# Altium PCB Infrared_Receive.PcbDoc
Units mil, origin at the board's own origin, x right, y up, seen from the top; angles counter-clockwise.
Board outline 2559.06 x 1968.5 mil, 2 copper layers (Top Layer, Bottom Layer); 43 components, 24 nets, 166 pads, 34 vias.
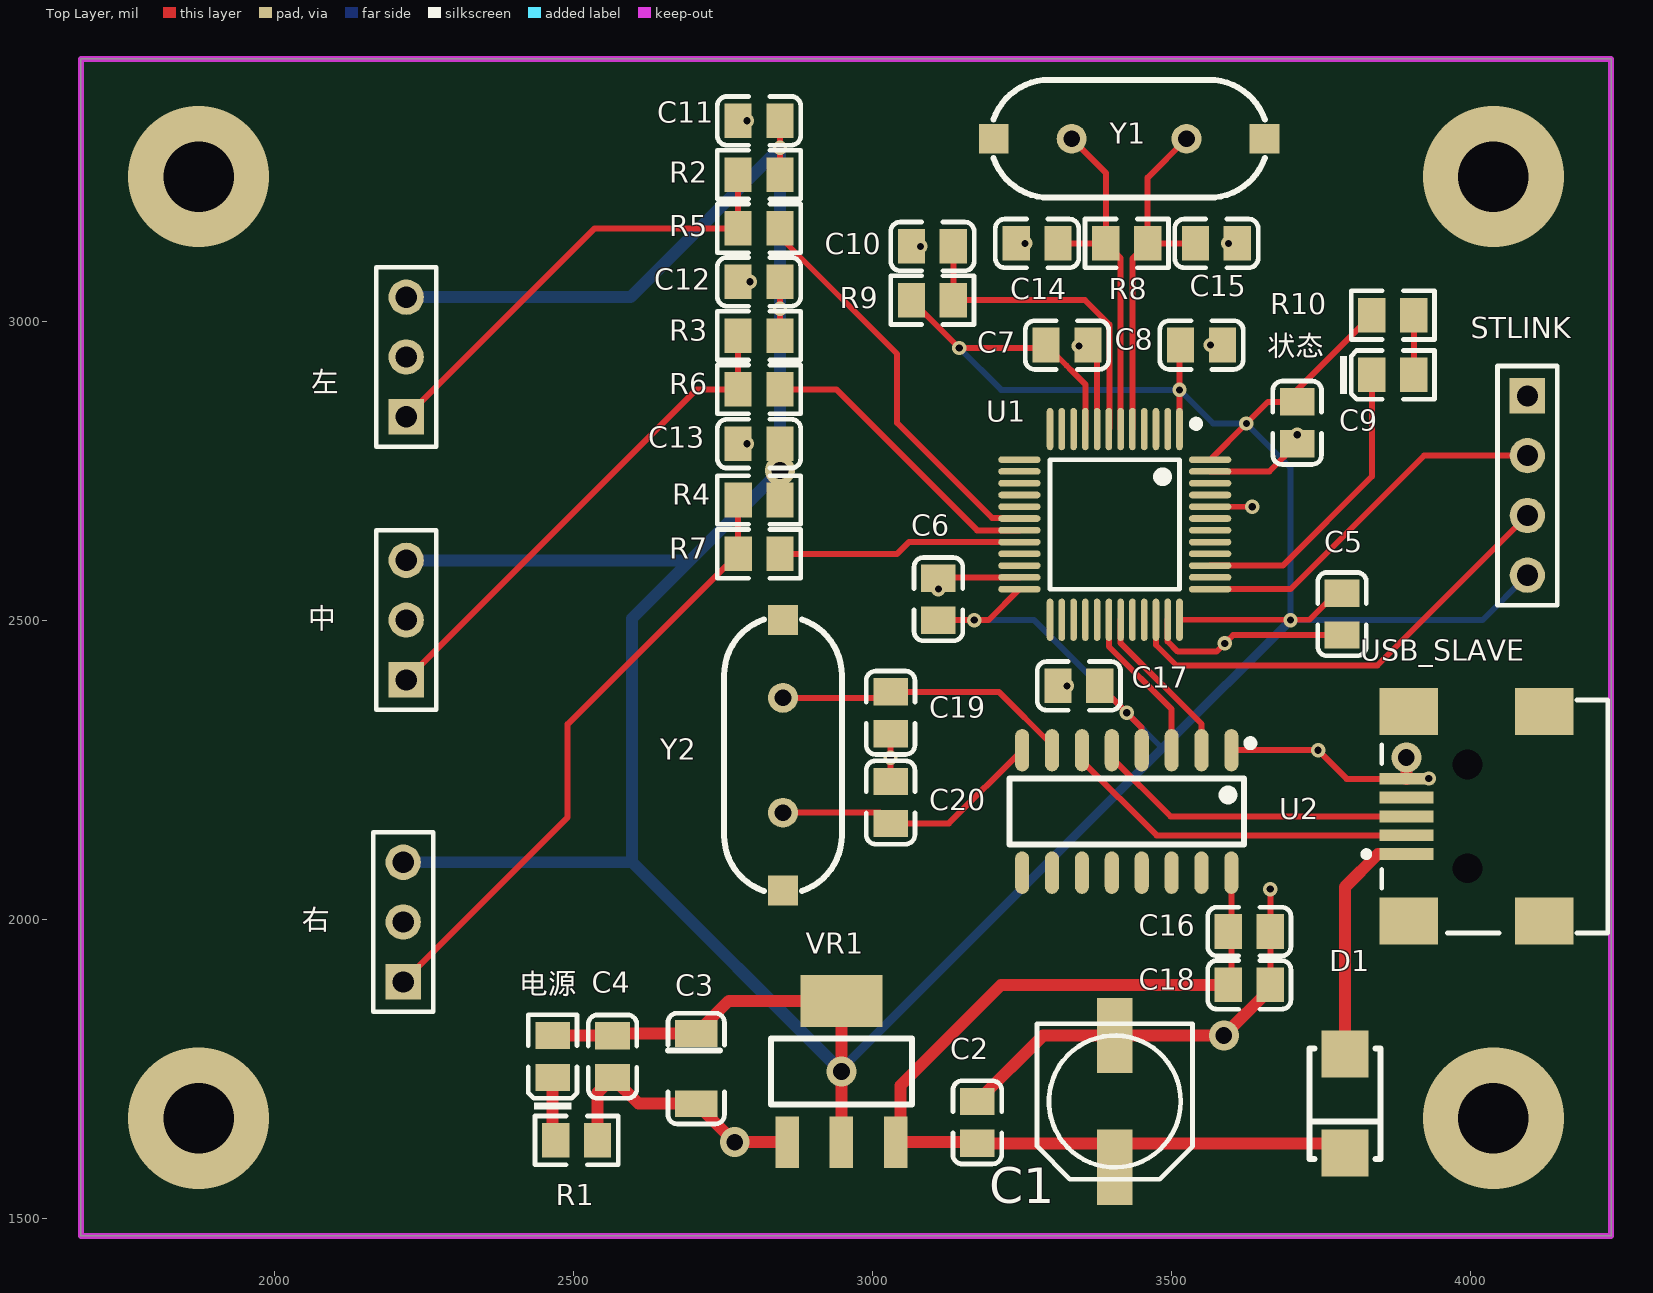
[diagram p0: Top Layer view]
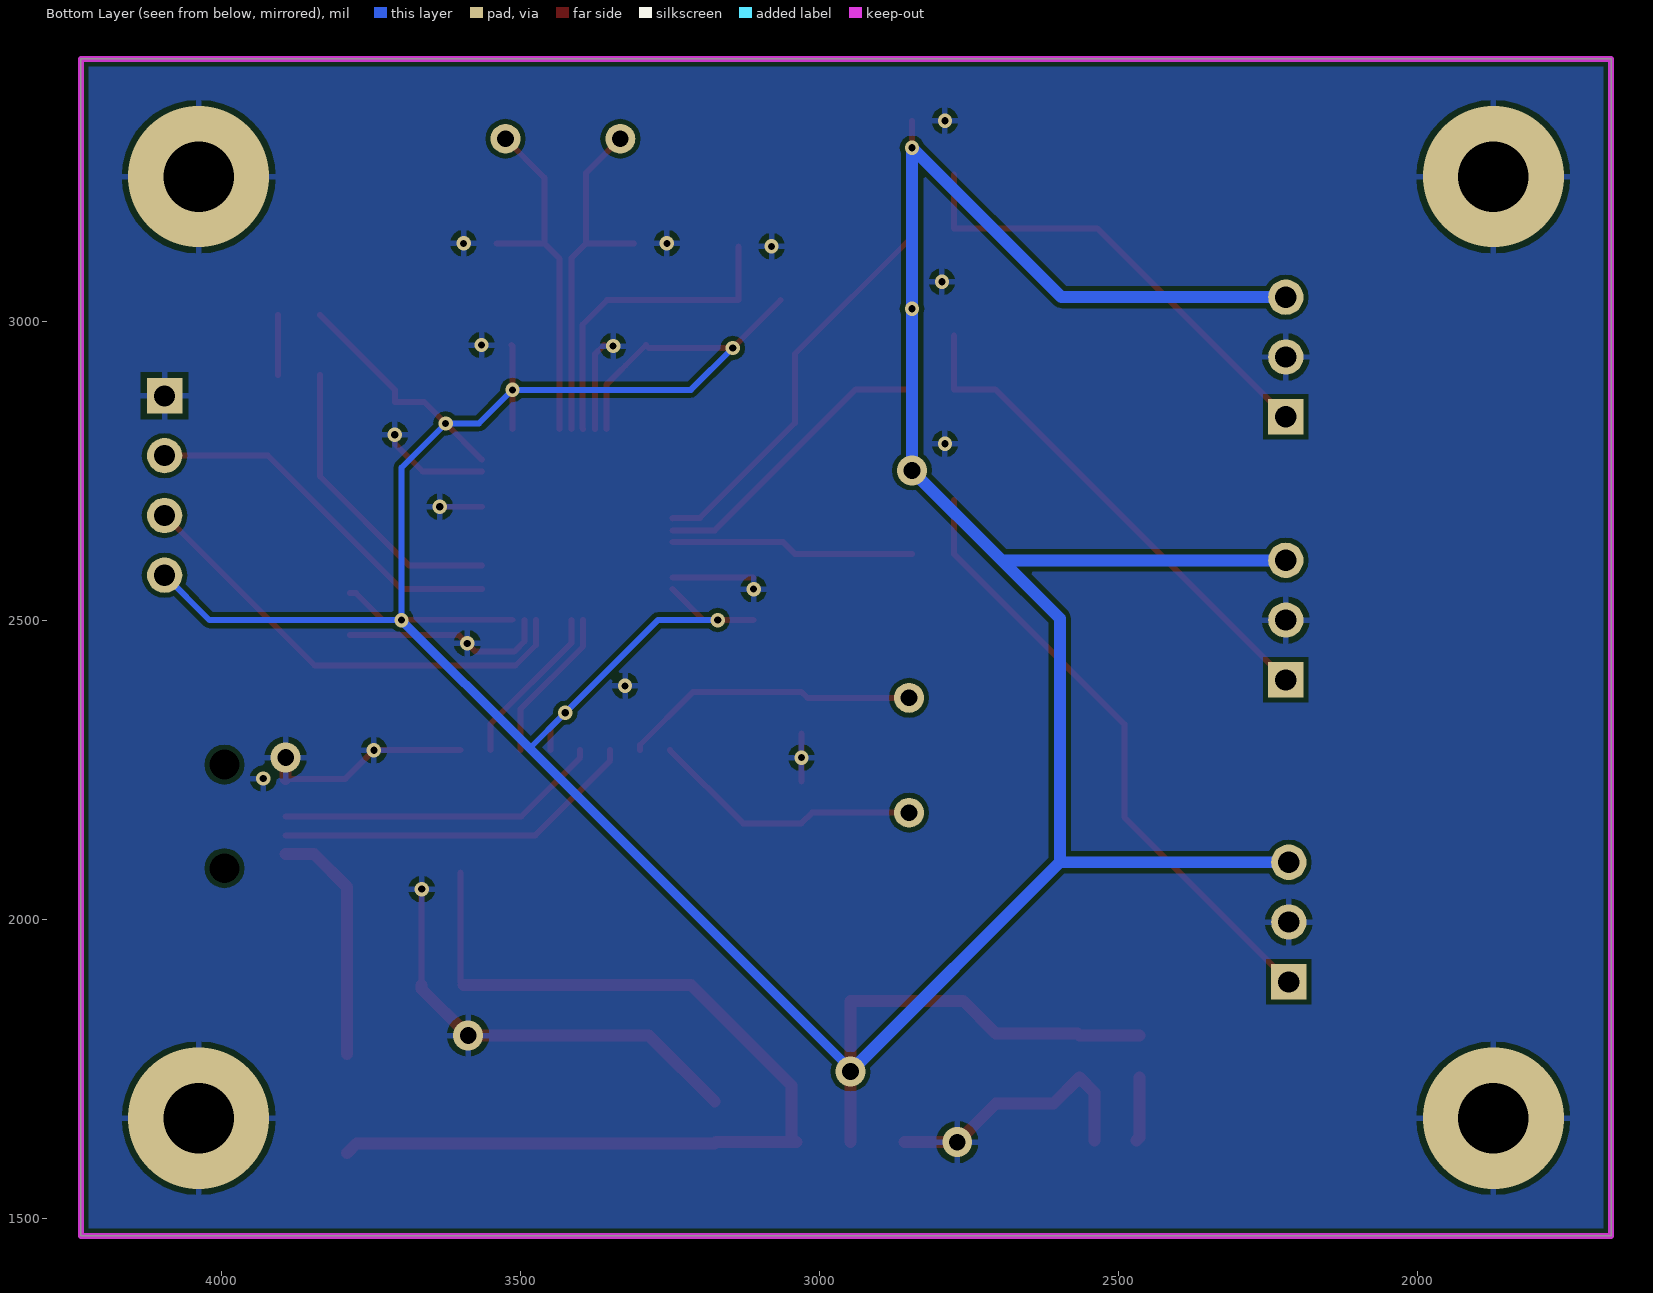
[diagram p1: Bottom Layer view, seen from below]
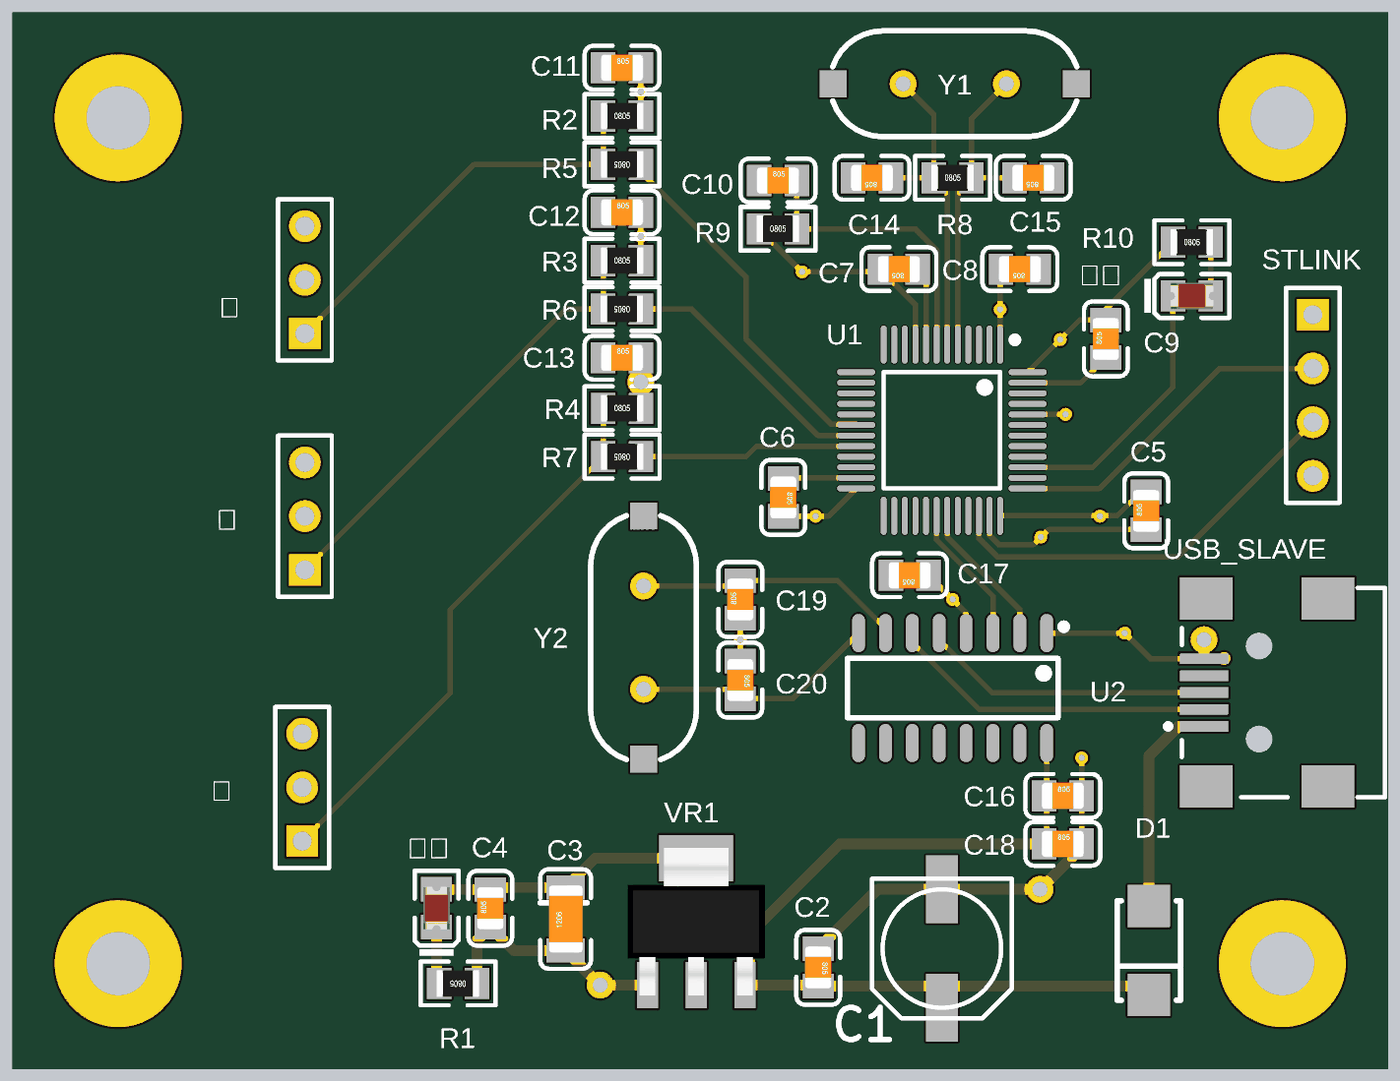
[diagram p2: 3D render of the assembled board from above, using the file's embedded part models]

## Layer stack, top to bottom
Top Solder: solder mask 0.4, Solder Resist, Dk 3.5
Top Layer: signal copper 1.4
Dielectric 1: dielectric 12.6, FR-4, Dk 4.8
Bottom Layer: signal copper 1.4
Bottom Solder: solder mask 0.4, Solder Resist, Dk 3.5

## Board outline
1675.94,1470 1675.94,3438.5 4235,3438.5 4235,1470

## Design rules (kind name [scope] priority, off if disabled: settings)
Clearance [All] p1: gap=8 ignorepadtopadclearanceinfootprint=FALSE
PolygonConnect [All] p1: connectstyle=Relief reliefconductorwidth=10 reliefentries=4 polygonreliefangle="90 Angle" airgapwidth=10
RoutingVias [All] p1: holewidth=28 width=50 viastyle="Through Hole" minholewidth=28 minwidth=50 maxholewidth=28 maxwidth=50
SolderMaskExpansion [All] p1: expansion=4
Width [All] p1: maxlimit=20 minlimit=10 preferedwidth=10
30 further rules are at their usual default settings.

## Components (designator, comment, footprint, x,y, rotation, side; value= is the part's Value field where it differs from the comment)
C1 "220uF" CC6.56.5 3405,1695 r90 top
C2 "100nF(104) 10% 50V" LC-0805_C 3175,1660 r270 top
C3 "4.7uF (475) 10% 50V" LC-1206_C 2705,1750 r90 top
C4 "100nF(104) 10% 50V" LC-0805_C 2565,1770 r90 top
C5 "100nF(104) 10% 50V" LC-0805_C 3785,2510 r90 top
C6 "100nF(104) 10% 50V" LC-0805_C 3110,2535 r270 top
C7 "100nF(104) 10% 50V" LC-0805_C 3325,2960 r180 top
C8 "100nF(104) 10% 50V" LC-0805_C 3550,2960 r180 top
C9 "100nF(104) 10% 50V" LC-0805_C 3710,2830 r90 top
C10 "100nF(104) 10% 50V" LC-0805_C 3100.04,3125 r0 top
C11 "4.7nF (472) 10% 50V" LC-0805_C 2810,3335 r0 top
C12 "4.7nF (472) 10% 50V" LC-0805_C 2810,3065.79 r0 top
C13 "4.7nF (472) 10% 50V" LC-0805_C 2810.04,2795 r0 top
C14 "22pF (220) 5% 50V" LC-0805_C 3275,3130 r180 top
C15 "22pF (220) 5% 50V" LC-0805_C 3575,3130 r180 top
C16 "10uF (106) 10% 25V" LC-0805_C 3630,1979.19 r0 top
C17 "100nF(104) 10% 50V" LC-0805_C 3345,2390 r180 top
C18 "100nF(104) 10% 50V" LC-0805_C 3630,1890 r0 top
C19 "22pF (220) 5% 50V" LC-0805_C 3030,2345 r90 top
C20 "22pF (220) 5% 50V" LC-0805_C 3030,2195 r270 top
D1 "SS210" LC-SMA(DO-214AC)_S1 3790,1691.34 r90 top
R1 "10KΩ (1002) ±1%" LC-0805_R 2505,1630 r180 top
R2 "4.7KΩ (4701) ±1%" LC-0805_R 2810,3245 r0 top
R3 "4.7KΩ (4701) ±1%" LC-0805_R 2810,2975.79 r0 top
R4 "4.7KΩ (4701) ±1%" LC-0805_R 2810.08,2700.88 r0 top
R5 "1KΩ (1001) ±1%" LC-0805_R 2810.04,3155 r180 top
R6 "1KΩ (1001) ±1%" LC-0805_R 2810,2885.79 r180 top
R7 "1KΩ (1001) ±1%" LC-0805_R 2810.08,2610.88 r180 top
R8 "1MΩ (1004) ±1%" LC-0805_R 3425,3130 r0 top
R9 "10KΩ (1002) ±1%" LC-0805_R 3100,3035 r0 top
R10 "10KΩ (1002) ±1%" LC-0805_R 3870,3010 r0 top
STLINK "Header 4" HDR1X4 4095,2875 r270 top
U1 "STM32F103C8T6" LC-LQFP-48_7x7x05P 3404.96,2660 r180 top
U2 "CH340G" LC-SOIC-16_150mil 3425,2180 r180 top
USB_SLAVE "USB-B(Mini)" USB/SM0.8-6H5 4201.69,2171.61 r0 top
VR1 "AMS1117-3.3" LC-SOT-223 2947.87,1745 r270 top
Y1 "8MHz" XTAL_US 3332.87,3305 r0 top
Y2 "12MHz" XTAL_US 2850,2370 r270 top
中 "Header 3" HDR1X3 2220,2400 r90 top
右 "Header 3" HDR1X3 2215,1895 r90 top
左 "Header 3" HDR1X3 2220,2840 r90 top
状态 "翠绿 0805" LC-0805_LED_S1 3870,2910 r0 top (schematic designator ״̬)
电源 "红灯 0805" LC-0805_LED_S1 2465,1770.2 r90 top

## Footprints (in the part's own frame and the unit in brackets; to place one, negate y for a bottom-side part, rotate by r counter-clockwise, add the part's x,y. Pads: shape width x height; smd on the part's side, far side on the other; paste and mask are expansions set on the pad)
CC6.56.5 [mm]
  rect 3.2x1.5 smd: 1(-2.794,0) 2(2.8,0)
  silkscreen extent -3.3,-3.3 3.3,3.3
HDR1X3 [mm] "Connector; Header; 3 Position"
  rect 1.5x1.5 hole 0.9: 1(0,0)
  round 1.5 hole 0.9: 2(2.54,0) 3(5.08,0)
  silkscreen extent -1.27,-1.27 6.35,1.27
HDR1X4 [mm] "Connector; Header; 4 Position"
  rect 1.5x1.5 hole 0.9: 1(0,0)
  round 1.5 hole 0.9: 2(2.54,0) 3(5.08,0) 4(7.62,0)
  silkscreen extent -1.27,-1.27 8.89,1.27
LC-0805_C [mm]
  rect 1.16x1.47 smd: 1(-0.89,0) 2(0.89,0)
  silkscreen extent -1.77,-1.04 1.77,1.04, body extent -1,-0.62 1,0.63, height 0.77
LC-0805_LED_S1 [mm]
  rect 1.16x1.47 smd: A(0.89,0) K(-0.89,0)
  silkscreen extent -2.24,-1.04 1.77,1.03, body extent -1.01,-0.62 1.01,0.62, height 1.1
LC-0805_R [mm]
  rect 1.16x1.47 smd: 1(-0.89,0) 2(0.89,0)
  silkscreen extent -1.77,-1.04 1.77,1.03, body extent -1,-0.62 1,0.63, height 0.49
LC-1206_C [mm]
  rect 1.13x1.8 smd: 1(-1.49,0) 2(1.49,0)
  silkscreen extent -2.36,-1.2 2.35,1.2, body extent -1.6,-0.81 1.6,0.79, height 1
LC-LQFP-48_7x7x05P [mm]
  oval 0.28x1.8 smd mask+0.051: 1(-2.75,-4.05) 2(-2.25,-4.05) 3(-1.75,-4.05) 4(-1.25,-4.05) 5(-0.75,-4.05) 6(-0.25,-4.05) 7(0.25,-4.05) 8(0.75,-4.05) 9(1.25,-4.05) 10(1.75,-4.05) 11(2.25,-4.05) 12(2.75,-4.05) 25(2.75,4.05) 26(2.25,4.05) 27(1.75,4.05) 28(1.25,4.05) 29(0.75,4.05) 30(0.25,4.05) 31(-0.25,4.05) 32(-0.75,4.05) 33(-1.25,4.05) 34(-1.75,4.05) 35(-2.25,4.05) 36(-2.75,4.05)
  oval 1.8x0.28 smd mask+0.051: 13(4.05,-2.75) 14(4.05,-2.25) 15(4.05,-1.75) 16(4.05,-1.25) 17(4.05,-0.75) 18(4.05,-0.25) 19(4.05,0.25) 20(4.05,0.75) 21(4.05,1.25) 22(4.05,1.75) 23(4.05,2.25) 24(4.05,2.75) 37(-4.05,2.75) 38(-4.05,2.25) 39(-4.05,1.75) 40(-4.05,1.25) 41(-4.05,0.75) 42(-4.05,0.25) 43(-4.05,-0.25) 44(-4.05,-0.75) 45(-4.05,-1.25) 46(-4.05,-1.75) 47(-4.05,-2.25) 48(-4.05,-2.75)
  silkscreen extent -3.6,-4.42 2.75,2.75
LC-SMA(DO-214AC)_S1 [mm]
  rect 2x2 smd: 1(2.1,0) 2(-2.1,0)
  silkscreen extent -2.35,-1.5 2.35,1.5
LC-SOIC-16_150mil [mm]
  oval 0.6x1.8 smd: 1(-4.445,-2.6) 2(-3.175,-2.6) 3(-1.905,-2.6) 4(-0.635,-2.6) 5(0.635,-2.6) 6(1.905,-2.6) 7(3.175,-2.6) 8(4.445,-2.6) 9(4.445,2.6) 10(3.175,2.6) 11(1.905,2.6) 12(0.635,2.6) 13(-0.635,2.6) 14(-1.905,2.6) 15(-3.175,2.6) 16(-4.445,2.6)
  silkscreen extent -5.4,-3.05 4.97,1.4
LC-SOT-223 [mm]
  rect 2.2x1 smd: 1(3,-2.3) 2(3,0) 3(3,2.3)
  rect 2.2x3.5 smd: 2(-3,0)
  silkscreen extent -1.4,-3 1.4,3, body extent -3.49,-3.24 3.49,3.24, height 1.64
USB/SM0.8-6H5 [mm]
  rect 2.3x0.5 smd: 1(-7.85,-1.6) 2(-7.85,-0.8) 3(-7.85,0) 4(-7.85,0.8) 5(-7.85,1.6)
  rect 2.5x2 smd: 6(-7.75,4.45) 7(-1.996,4.45) 8(-7.75,-4.45) 9(-1.996,-4.45)
  round 0.6 hole 1.27 unplated: MH1(-5.25,2.2) MH2(-5.25,-2.2)
  silkscreen extent -9.67,-4.95 0.7,4.95
XTAL_US [mil]
  round 50 hole 28: 1(0,0) 2(192.13,0)
  rect 50x50 smd: ""(-130.32,0) ""(322.44,0)
  silkscreen extent -131,-98 323,98

## Part data
C1: library part CAP
C2 C4 C5 C6 C7 C8 C9 C10 C17 C18: library part "0805 100nF(104) 10% 50V", "贴片电容", Package=0805, SuppliersPartNumber=C49678, ComponentLink1Description=供应商链接, ComponentLink1URL=http://www.szlcsc.com/product/details_50686.html, Supplier=LC
C3: library part "1206 4.7uF (475) 10% 50V", "贴片电容", Package=1206, SuppliersPartNumber=C29823, ComponentLink1Description=供应商, ComponentLink1URL=http://www.szlcsc.com/product/details_30577.html, Supplier=LC
C11 C12 C13: library part "0805 4.7nF (472) 10% 50V", "贴片电容", Package=0805, SuppliersPartNumber=C1744, ComponentLink1Description=供应商链接, ComponentLink1URL=http://www.szlcsc.com/product/details_2096.html, Supplier=LC
C14 C15 C19 C20: library part "0805 22pF (220) 5% 50V", "贴片电容", Package=0805, SuppliersPartNumber=C1804, ComponentLink1Description=供应商链接, ComponentLink1URL=http://www.szlcsc.com/product/details_2156.html, Supplier=LC
C16: library part "0805 10uF (106) 10% 25V", "贴片电容", Package=0805, SuppliersPartNumber=C15850, ComponentLink1Description=供应商链接, ComponentLink1URL=http://www.szlcsc.com/product/details_16532.html, Supplier=LC
D1: library part "SMA(DO-214AC) SS210", "二极管", Package=SMA(DO-214AC), SuppliersPartNumber=C14996, ComponentLink1Description=供应商链接, ComponentLink1URL=http://www.szlcsc.com/product/details_15669.html, Supplier=LC
R1 R9 R10: library part "0805 10KΩ (1002) 1%", "贴片电阻", Package=0805, SuppliersPartNumber=C17414, ComponentLink1URL=http://www.szlcsc.com/product/details_18102.html, Supplier=LC
  R1 R9: ComponentLink1Description=供应商链接
  R10: ComponentLink1Description=供应商
R2 R3 R4: library part "0805 4.7KΩ (4701) 1%", "贴片电阻", Package=0805, SuppliersPartNumber=C17673, ComponentLink1Description=供应商, ComponentLink1URL=http://www.szlcsc.com/product/details_18361.html, Supplier=LC
R5 R6 R7: library part "0805 1KΩ (1001) 1%", "贴片电阻", Package=0805, SuppliersPartNumber=C17513, ComponentLink1Description=供应商, ComponentLink1URL=http://www.szlcsc.com/product/details_18201.html, Supplier=LC
R8: library part "0805 1MΩ (1004) 1%", "贴片电阻", Package=0805, SuppliersPartNumber=C17514, ComponentLink1Description=供应商链接, ComponentLink1URL=http://www.szlcsc.com/product/details_18202.html, Supplier=LC
STLINK: "Header, 4-Pin", LatestRevisionDate=17-Jul-2002, LatestRevisionNote="Re-released for DXP Platform.", Publisher="Altium Limited"
U1: "ARM", Package=LQFP-48_7x7x05P, SuppliersPartNumber=C8734, ComponentLink1Description=供应商链接, ComponentLink1URL=http://www.szlcsc.com/product/details_9243.html, Supplier=LC
U2: "USB", Package=SOIC-16_150mil, SuppliersPartNumber=C14267, ComponentLink1Description=供应商链接, ComponentLink1URL=http://www.szlcsc.com/product/details_14927.html, Supplier=LC
USB_SLAVE: library part USB5
VR1: library part "SOT-223 AMS1117-3.3", "低压差线性稳压(LDO)", Package=SOT-223, SuppliersPartNumber=C6186, ComponentLink1Description=供应商链接, ComponentLink1URL=http://www.szlcsc.com/product/details_6652.html, Supplier=LC
Y1 Y2: library part XTAL, "Crystal Oscillator", LatestRevisionDate=17-Jul-2002, LatestRevisionNote="Re-released for DXP Platform.", Published=8-Jun-2000, Publisher="Altium Limited"
中 右 左: "Header, 3-Pin", LatestRevisionDate=17-Jul-2002, LatestRevisionNote="Re-released for DXP Platform.", Publisher="Altium Limited"
状态: library part "0805 翠绿", "发光二极管", Package=0805, SuppliersPartNumber=C2297, ComponentLink1Description=供应商, ComponentLink1URL=http://www.szlcsc.com/product/details_2670.html, Supplier=LC
电源: library part "0805 红灯", "发光二极管", Package=0805, SuppliersPartNumber=C2295, ComponentLink1Description=供应商链接, ComponentLink1URL=http://www.szlcsc.com/product/details_2668.html, Supplier=LC

## Via types
v1: diameter 24, hole 12, Top Layer to Bottom Layer, 25 vias
v2: diameter 50, hole 28, Top Layer to Bottom Layer, 5 vias
v3: diameter 236.22, hole 118.11, Top Layer to Bottom Layer, 4 vias

## Nets (pads, with @x,y where several pads share a name; then routed paths per layer and width w, separated by ;. In a path a pad name is that pad's centre, name@x,y a point inside that pad or via, vN(x,y) a via of type N, cw(c..) or ccw(c..) an arc to the next point about the centre after c; other vN are vias at no path point)
+3.3: C3.2 C4.2 C5.2 C6.2 C7.2 C8.2 C9.2 C11.2 C12.2 C13.2 C17.1 R2.2 R3.2 R4.2 R9.1 R10.1 STLINK.4 U1.1 U1.9 U1.24 U1.36 U1.48 U2.4 VR1.2 中.3 右.3 左.3 电源.A | length 8621.1
  Top Layer w10: R3.2 v1(2845.04,3020.79) C12.2 ; R2.2 v1(2845.04,3290) C11.2 ; R9.1 3064.96,3034.92 v1(3144.88,2955) 3284.96,2955 C7.2 3324.2,2925.76 3324.2,2925.68 3331.82,2918.06 3331.9,2918.06 3355.75,2894.21 U1.9 ; C6.2 v1(3170,2499.96) 3193.74,2499.96 U1.24 ; C17.1 v1(3425,2345.04) 3450,2320.04 U2.4 ; U1.36 3730.55,2500.55 3775.04,2545.04 C5.2 ; U1.1 v1(3513.23,2885) 3513.23,2958.27 C8.2 ; U1.48 v1(3625,2828.86) 3661.18,2865.04 C9.2 3710,2885.04 R10.1
  Top Layer w20: 电源.A 2465.2,1805.04 C4.2 ; C4.2@2568.62,1808.66 C3.2 2759.45,1863.11 2947.87,1863.11 v2(2947.87,1745) VR1.2@2947.87,1626.89
  Bottom Layer w10: v1(3144.88,2955) 3214.88,2885 v1(3513.23,2885) 3569.37,2828.86 v1(3625,2828.86) 3698.9,2754.96 v1(3698.9,2500) 4020,2500 STLINK.4 ; v1(3170,2499.96) 3270.08,2499.96 v1(3425,2345.04) 3483.94,2286.1 3485,2286.1
  Bottom Layer w15: v2(2947.87,1745) 2947.87,1748.98 3485,2286.1 v1(3698.9,2500)
  Bottom Layer w20: 右.3 2597.87,2095 ; 中.3 2695,2600 ; 左.3 2595.04,3040 v1(2845.04,3290) v1(2845.04,3020.79) v2(2845.04,2750.04) 2695,2600 ; v2(2947.87,1745) 2597.87,2095 ; 2597.87,2095 2597.87,2502.87 2695,2600
+5: C1.1 C2.2 C16.1 C18.1 D1.2 U2.16 VR1.3 | length 1658.8
  Top Layer w10: C18.1 3600,1895.04 U2.16
  Top Layer w20: VR1.3 VR1.3@3046.89,1626.89 ; C2.2@3173.07,1626.89 VR1.3@3046.89,1626.89 ; C2.2 3773.7,1624.96 D1.2 ; C18.1 3215,1890 3046.89,1721.89 VR1.3@3046.89,1626.89
GND: C1.2 C2.1 C3.1 C4.1 C5.1 C6.1 C7.1 C8.1 C9.1 C10.1 C11.1 C12.1 C13.1 C14.2 C15.1 C16.2 C17.2 C18.2 C19.1 C20.1 R1.1 STLINK.1 U1.8 U1.23 U1.35 U1.44 U1.47 U2.1 USB_SLAVE.5 VR1.1 中.2 右.2 左.2 | length 2480
  Top Layer w10: C20.1 C19.1 ; C6.1 3111.38,2571.42 U1.23 ; C7.1 3375.43,2944.61 U1.8 ; U1.35 3493.54,2464.14 3510.55,2447.13 3575,2447.13 3602.83,2474.96 C5.1 ; U1.44 v1(3635,2689.53) ; U1.47 3663.62,2748.58 C9.1 ; U2.1 v1(3745,2282.36) 3792.76,2234.6 USB_SLAVE.5 ; C18.2 C16.2 v1(3665.04,2050)
  Top Layer w20: R1.1 2540.04,1710 C4.1 2608.62,1691.34 C3.1 v2(2769.45,1626.89) VR1.1 ; C2.1 3285.2,1805.24 C1.2 v2(3587.42,1805.24) 3665.04,1882.85 C18.2 ; USB_SLAVE.5 v2(3892.64,2270)
  other v1: 3930,2235 3030,2270 3325,2390 3588.92,2461.04 3110,2551.73 2790,2795 3710,2810 3345,2958.27 3565,2960 2795,3065.79 3080,3125 3255,3130 3595,3130 2790,3335
  other v3: 1872.8,1666.85 4038.15,1666.85 1872.8,3241.65 4038.15,3241.65
Left: R5.1 U1.18 | length 677.9
  Top Layer w10: R5.1 2845.08,3140.71 3040.88,2944.91 3040.88,2829.68 3199.55,2671.02 3245.51,2671.02 U1.18
Middle: R6.1 U1.19 | length 498.1
  Top Layer w10: R6.1 2939.21,2885.79 3174.84,2650.16 U1.19
NetC10_2: C10.2 R9.2 U1.7 | length 542.9
  Top Layer w10: C10.2 3135.08,3035.04 R9.2 3355.2,3035 3395.87,2994.32 3395.87,2820.2 U1.7
NetC14_1: C14.1 R8.1 U1.6 Y1.1 | length 599.4
  Top Layer w10: C14.1 R8.1 ; Y1.1 3389.96,3247.91 R8.1 ; U1.6 3414.8,3060.16 3414.8,3105.16 R8.1
NetC15_2: C15.2 R8.2 U1.5 Y1.2 | length 603
  Top Layer w10: U1.5 3434.49,3061.97 3434.49,3104.45 R8.2 ; Y1.2 3460.04,3240.04 R8.2 ; C15.2 R8.2
NetC19_2: C19.2 U2.7 Y2.1 | length 499.7
  Top Layer w10: Y2.1 3019.96,2370 C19.2 3211.03,2380.04 3300,2291.07 U2.7
NetC20_2: C20.2 U2.8 Y2.2 | length 458.1
  Top Layer w10: Y2.2 3012.09,2177.87 C20.2 3127.6,2159.96 U2.8
NetR1_2: R1.2 电源.K | length 107.2
  Top Layer w20: 电源.K 2465,1634.96 R1.2
NetR2_1: R2.1 R5.2 左.1 | length 775.4
  Top Layer w10: 左.1 2535,3155 R5.2 ; R5.2 R2.1
NetR3_1: R3.1 R6.2 中.1 | length 846.2
  Top Layer w10: 中.1 2705.79,2885.79 R6.2 R3.1
NetR4_1: R4.1 R7.2 右.1 | length 1037.9
  Top Layer w10: 右.1 2490,2170 2490,2325.84 R7.2 R4.1
NetR10_2: R10.2 状态.A | length 100
  Top Layer w10: 状态.A R10.2
NetU1_39: U1.39 状态.K | length 502.1
  Top Layer w10: U1.39 3685.9,2591.1 3834.96,2740.17 状态.K
NetU2_5: U2.5 USB_SLAVE.3 | length 545.8
  Top Layer w10: U2.5 3400,2270 3498.39,2171.61 USB_SLAVE.3
NetU2_6: U2.6 USB_SLAVE.2 | length 611.7
  Top Layer w10: U2.6 3350,2265 3474.88,2140.12 USB_SLAVE.2
Right: R7.1 U1.20 | length 408.5
  Top Layer w10: R7.1 3040.88,2610.88 3060.47,2630.47 U1.20
SWCLK: STLINK.2 U1.37 | length 623.1
  Top Layer w10: U1.37 3698.9,2551.73 3922.17,2775 STLINK.2
SWDIO: STLINK.3 U1.34 | length 781.4
  Top Layer w10: U1.34 3473.86,2458.36 3508.1,2424.13 3844.13,2424.13 STLINK.3
U_RX: U1.31 U2.2 | length 274.2
  Top Layer w10: U1.31 3414.8,2461.53 3550,2326.34 U2.2
U_TX: U1.30 U2.3 | length 261.6
  Top Layer w10: U1.30 3395.12,2455.76 3500,2350.88 U2.3
VUSB: D1.1 USB_SLAVE.1 | length 405
  Top Layer w20: D1.1 3790,2053.62 3845,2108.62 USB_SLAVE.1
pads on no net: U1.2 U1.3 U1.4 U1.10 U1.11 U1.12 U1.13 U1.14 U1.15 U1.16 U1.17 U1.21 U1.22 U1.25 U1.26 U1.27 U1.28 U1.29 U1.32 U1.33 U1.38 U1.40 U1.41 U1.42 U1.43 U1.45 U1.46 U2.9 U2.10 U2.11 U2.12 U2.13 U2.14 U2.15 USB_SLAVE.4 USB_SLAVE.6 USB_SLAVE.7 USB_SLAVE.8 USB_SLAVE.9 USB_SLAVE.MH1 USB_SLAVE.MH2 Y1. Y2.

## Polygon pours and split planes (outlines as drawn)
GND on Bottom Layer "Bottom Layer-GND" (solid, pour order 0): 1675.94,3438.5 4235,3438.5 4235,1475 4230,1470 1675.94,1470

## Keep-outs
Keep-Out Layer:
  the board outline again, w10

## Silkscreen, mask and mechanical layers (free items; w line width, h text height)
Top Overlay:
  lines w10: 2657.76,1780 2745,1780